# Altium PCB pcb.PcbDoc
Units mm, origin at the board's own origin, x right, y up, seen from the top; angles counter-clockwise.
Board outline 50 x 50 mm, 2 copper layers (Top Layer, Bottom Layer); 8 components, 15 nets, 61 pads, 4 vias.
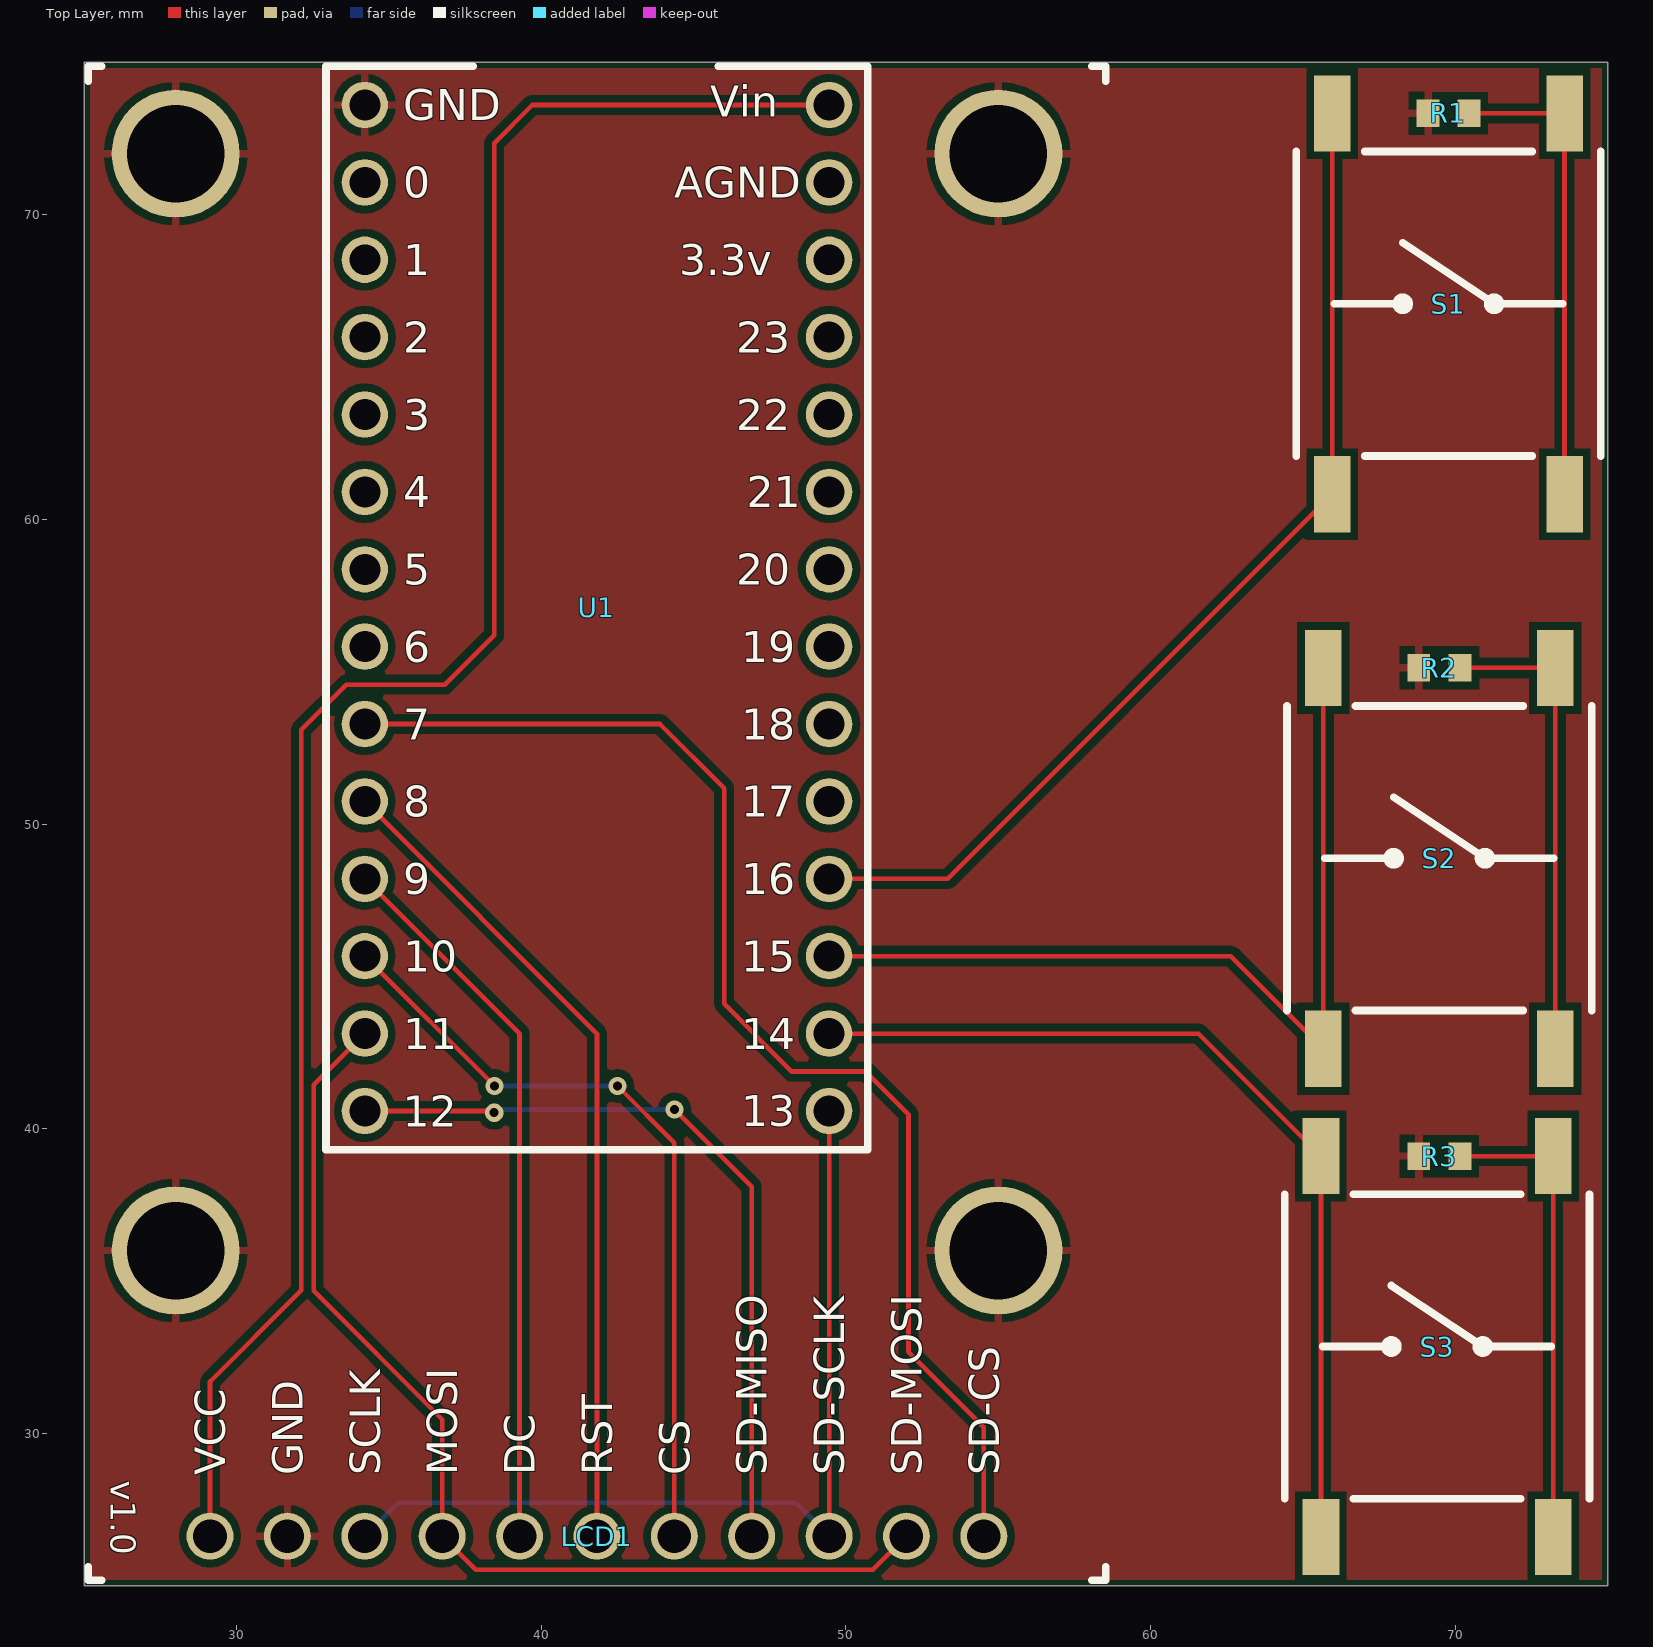
[diagram p0: Top Layer view]
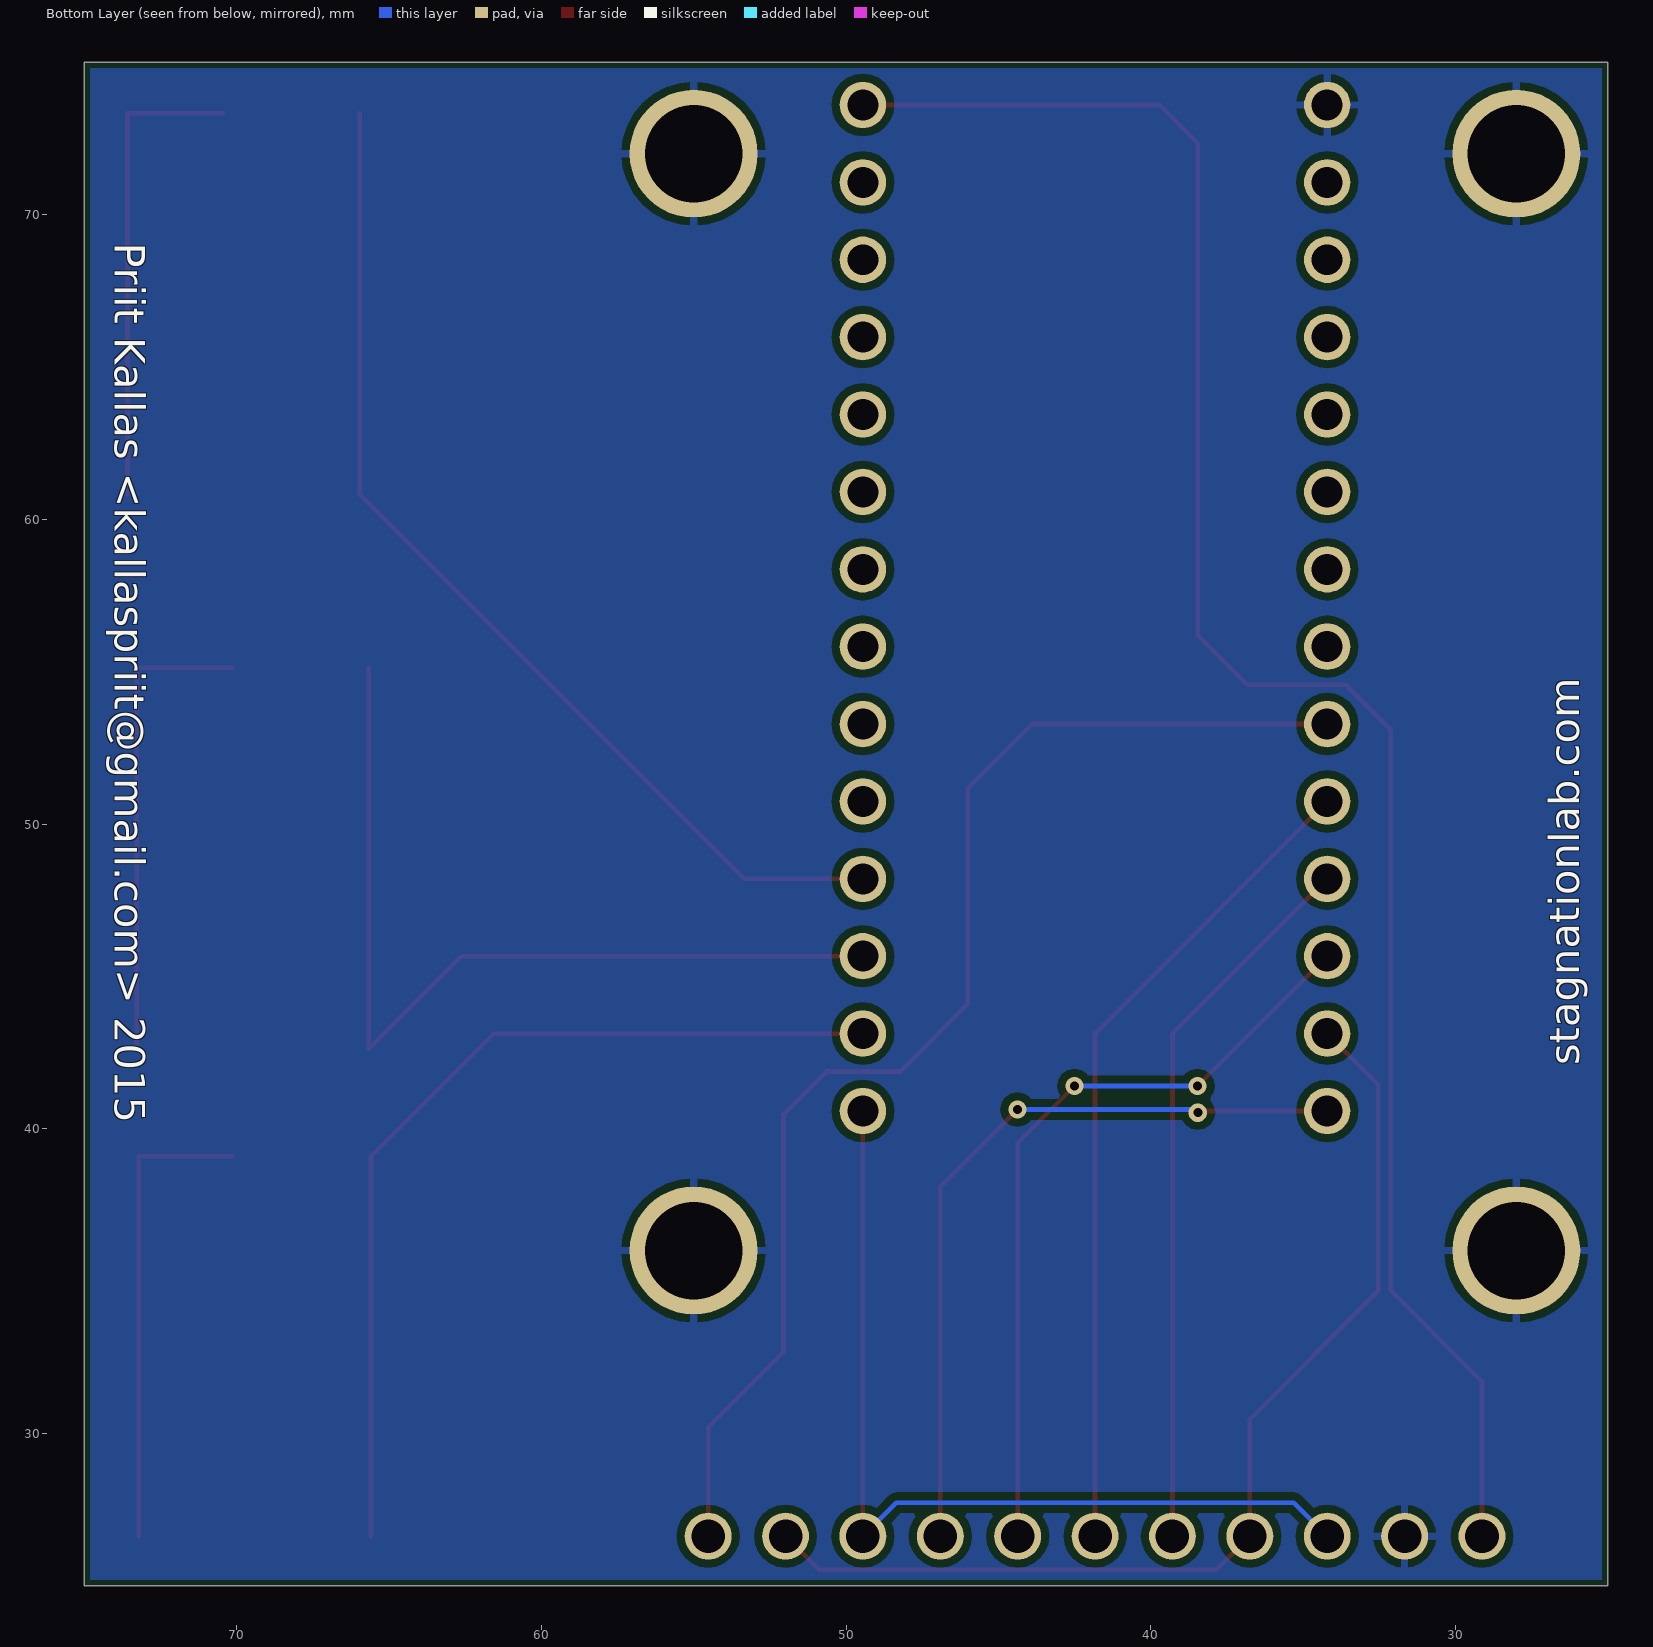
[diagram p1: Bottom Layer view, seen from below]

## Layer stack, top to bottom
Top Solder: solder mask 0.0102, Solder Resist, Dk 3.5
Top Layer: signal copper 0.0356
Dielectric 1: dielectric 0.32, FR-4, Dk 4.8
Bottom Layer: signal copper 0.0356
Bottom Solder: solder mask 0.0102, Solder Resist, Dk 3.5

## Board outline
25,25 75,25 75,75 25,75

## Design rules (kind name [scope] priority, off if disabled: settings)
Clearance [All] p1: gap=0.254
HoleSize [All] p1: absolutevalues=TRUE maxlimit=6 minlimit=0.025 maxpercent=80.000 minpercent=20.000
PolygonConnect [All] p1: connectstyle=Relief reliefconductorwidth=0.254 reliefentries=4 polygonreliefangle="90 Angle" airgapwidth=0.254
RoutingVias [All] p1: holewidth=0.3 width=0.6 viastyle="Through Hole" minholewidth=0.3 minwidth=0.6 maxholewidth=1.6 maxwidth=2
SolderMaskExpansion [All] p1: expansion=0.102
UnpouredPolygon [All] p1: allowunpoured=FALSE
Width [All] p1: maxlimit=0.254 minlimit=0.152 preferedwidth=0.152
28 further rules are at their usual default settings.

## Components (designator, comment, footprint, x,y, rotation, side; value= is the part's Value field where it differs from the comment)
LCD1 "LCD" ST7735 41.825,26.625 r0 top
R1 "Resistor" RESISTOR-0603 69.775,73.325 r180 top
R2 "Resistor" RESISTOR-0603 69.475,55.125 r180 top
R3 "Resistor" RESISTOR-0603 69.475,39.1 r180 top
S1 "Tactile switch" TACTILE-SWITCH 69.775,67.075 r90 top
S2 "Tactile switch" TACTILE-SWITCH 69.475,48.875 r90 top
S3 "Tactile switch" TACTILE-SWITCH 69.4,32.85 r90 top
U1 "TEENSY-3.1" TEENSY-3.1 34.205,73.6 r270 top

## Footprints (in the part's own frame and the unit in brackets; to place one, negate y for a bottom-side part, rotate by r counter-clockwise, add the part's x,y. Pads: shape width x height; smd on the part's side, far side on the other; paste and mask are expansions set on the pad)
RESISTOR-0603 [mm] "Chip resistor 0603 (1608)"
  rect 0.75x0.9 smd: 1(-0.675,0) 2(0.675,0)
  body extent -0.85,-0.45 0.85,0.45, height 0.45
ST7735 [mm] "ST7737 128x160 LCD"
  round 1.54 hole 1.1: 1(-12.7,0) 2(-10.16,0) 3(-7.62,0) 4(-5.08,0) 5(-2.54,0) 6(0,0) 7(2.54,0) 8(5.08,0) 9(7.62,0) 10(10.16,0) 11(12.7,0)
  silkscreen extent -16.7,-1.45 16.7,48.25
TACTILE-SWITCH [mm] "Large tactile switch"
  rect 2.5x1.2 smd: 1(-6.25,3.81) 1(6.25,3.81) 2(-6.25,-3.81) 2(6.25,-3.81)
  silkscreen extent -5,-5 5,5
TEENSY-3.1 [mil] "Teensy 3.1 breakout"
  round 60 hole 40: 0(100,0) 1(200,0) 2(300,0) 3(400,0) 3.3v(200,600) 4(500,0) 5(600,0) 6(700,0) 7(800,0) 8(900,0) 9(1000,0) 10(1100,0) 11(1200,0) 12(1300,0) 13(1300,600) 14(1200,600) 15(1100,600) 16(1000,600) 17(900,600) 18(800,600) 19(700,600) 20(600,600) 21(500,600) 22(400,600) 23(300,600) AGND(100,600) GND(0,0) Vin(0,600)
  silkscreen extent -50,-50 1350,650

## Part data
LCD1: library part ST7735
R1 R2 R3: library part RESISTOR
S1 S2 S3: library part TACTILE-SWITCH
U1: "Teensy 3.1 breakout"

## Free pads (board coordinates)
  round 4.2 hole 3.2: ""(28,36) ""(28,72) ""(55,36) ""(55,72)

## Via types
v1: diameter 0.6, hole 0.3, Top Layer to Bottom Layer, tented both sides, 4 vias

## Nets (pads, with @x,y where several pads share a name; then routed paths per layer and width w, separated by ;. In a path a pad name is that pad's centre, name@x,y a point inside that pad or via, vN(x,y) a via of type N, cw(c..) or ccw(c..) an arc to the next point about the centre after c; other vN are vias at no path point)
GND: LCD1.2 pad. R1.2 R2.2 R3.2 U1.GND
LCD-CS: LCD1.7 U1.10 | length 25.6
  Top Layer w0.152: U1.10 v1(38.465,41.4) ; v1(42.5,41.4) 44.365,39.535 LCD1.7
  Bottom Layer w0.152: v1(38.465,41.4) v1(42.5,41.4)
LCD-DC: LCD1.5 U1.9 | length 23.7
  Top Layer w0.152: U1.9 39.285,43.12 LCD1.5
LCD-RST: LCD1.6 U1.8 | length 27.3
  Top Layer w0.152: U1.8 41.825,43.12 LCD1.6
MISO: LCD1.8 U1.12 | length 25.4
  Top Layer w0.152: U1.12 38.445,40.58 38.452,40.573 v1(38.452,40.527) ; v1(44.373,40.627) 46.905,38.095 LCD1.8
  Bottom Layer w0.152: v1(38.452,40.527) 38.452,40.627 v1(44.373,40.627)
MOSI: LCD1.4 LCD1.10 U1.11 | length 35.1
  Top Layer w0.152: U1.11 32.525,41.44 32.525,34.675 36.745,30.455 LCD1.4 37.845,25.525 50.885,25.525 LCD1.10
NetR1_1: R1.1 S1.2 | length 15.6
  Top Layer w0.152: R1.1 73.585,73.325 S1.2@73.585,60.825
NetR2_1: R2.1 S2.2 | length 15.6
  Top Layer w0.152: R2.1 73.285,55.125 S2.2@73.285,42.625
NetR3_1: R3.1 S3.2 | length 15.6
  Top Layer w0.152: R3.1 73.21,39.1 S3.2@73.21,26.6
SCLK: LCD1.3 LCD1.9 U1.13 | length 30.1
  Top Layer w0.152: LCD1.9 U1.13
  Bottom Layer w0.152: LCD1.3 35.305,27.725 48.345,27.725 LCD1.9
SD-CS: LCD1.11 U1.7 | length 42.2
  Top Layer w0.152: U1.7 43.895,53.28 46,51.175 46,44.1 48.225,41.875 50.65,41.875 52.05,40.475 52.05,32.675 54.525,30.2 LCD1.11
SW1: S1.1 U1.16 | length 34.2
  Top Layer w0.152: U1.16 53.34,48.2 65.965,60.825 S1.1@65.965,73.325
SW2: S2.1 U1.15 | length 30
  Top Layer w0.152: U1.15 62.63,45.66 65.665,42.625 S2.1@65.665,55.125
SW3: S3.1 U1.14 | length 30.3
  Top Layer w0.152: U1.14 61.57,43.12 65.59,39.1 S3.1@65.59,26.6
VCC: LCD1.1 U1.Vin | length 63
  Top Layer w0.152: LCD1.1 29.125,31.7 32.119,34.694 32.119,53.094 33.6,54.575 36.825,54.575 38.45,56.2 38.45,72.35 39.7,73.6 U1.Vin
pads on no net: U1.0 U1.1 U1.2 U1.3 U1.3.3v U1.4 U1.5 U1.6 U1.17 U1.18 U1.19 U1.20 U1.21 U1.22 U1.23 U1.AGND

## Polygon pours and split planes (outlines as drawn)
GND on Top Layer "Top GND" (solid, pour order 2): 25.2,74.8 74.8,74.8 74.8,25.2 25.2,25.2
GND on Bottom Layer "Bottom GND" (solid, pour order 6): 25.2,74.8 74.8,74.8 74.8,25.2 25.2,25.2

## Silkscreen, mask and mechanical layers (free items; w line width, h text height)
Top Overlay:
  text "v1.0" at 25.875,28.45 h0.81 r270
Bottom Overlay:
  text "Priit Kallas <kallaspriit@gmail.com> 2015" at 74,69.077 h1 r90
  text "stagnationlab.com" at 25.925,42.086 h1 r270
Mechanical 1:
  the board outline again, w0.254

## Text inside footprints (layer, text, board x,y; h text height)
LCD1: Top Overlay "SD-CS" at 55.025,28.625 h1 r90; Top Overlay "SD-MOSI" at 52.485,28.625 h1 r90; Top Overlay "SD-SCLK" at 49.945,28.625 h1 r90; Top Overlay "SD-MISO" at 47.405,28.625 h1 r90; Top Overlay "CS" at 44.865,28.625 h1 r90; Top Overlay "RST" at 42.325,28.625 h1 r90; Top Overlay "DC" at 39.785,28.625 h1 r90; Top Overlay "MOSI" at 37.245,28.625 h1 r90; Top Overlay "SCLK" at 34.705,28.625 h1 r90; Top Overlay "GND" at 32.165,28.625 h1 r90; Top Overlay "VCC" at 29.625,28.625 h1 r90
U1: Top Overlay "11" at 35.475,42.612 h1.02; Top Overlay "10" at 35.475,45.152 h1.02; Top Overlay "9" at 35.475,47.692 h1.02; Top Overlay "8" at 35.475,50.232 h1.02; Top Overlay "7" at 35.475,52.772 h1.02; Top Overlay "6" at 35.475,55.312 h1.02; Top Overlay "5" at 35.475,57.852 h1.02; Top Overlay "4" at 35.475,60.392 h1.02; Top Overlay "3" at 35.475,62.932 h1.02; Top Overlay "2" at 35.475,65.472 h1.02; Top Overlay "1" at 35.475,68.012 h1.02; Top Overlay "0" at 35.475,70.552 h1.02; Top Overlay "GND" at 35.475,73.092 h1.02; Top Overlay "14" at 46.566,42.612 h1.02; Top Overlay "15" at 46.566,45.152 h1.02; Top Overlay "16" at 46.566,47.692 h1.02; Top Overlay "17" at 46.566,50.232 h1.02; Top Overlay "18" at 46.566,52.772 h1.02; Top Overlay "19" at 46.566,55.312 h1.02; Top Overlay "20" at 46.396,57.852 h1.02; Top Overlay "21" at 46.735,60.392 h1.02; Top Overlay "22" at 46.396,62.932 h1.02; Top Overlay "23" at 46.396,65.472 h1.02; Top Overlay "3.3v" at 44.534,68.012 h1.02; Top Overlay "AGND" at 44.365,70.552 h1.02; Top Overlay "Vin" at 45.55,73.219 h1.02; Top Overlay "13" at 46.566,40.087 h1.02; Top Overlay "12" at 35.45,40.062 h1.02